# EAGLE board Music_Sync_Voltera (EAGLE 9.4.2)

Size 68.58 x 47.5 mm. Coordinates in mm from the lower left corner, seen from the top.
Copper layers (1*16): Top 0.035mm / dielectric 1.5mm / Bottom 0.035mm
Design rules "default": minimum track width 6mil, minimum drill 0.35mm, track to track 6mil, track to pad 6mil, pad to pad 6mil, via to via 6mil, smd to smd 6mil, copper to edge 40mil, drill to drill 6mil, minimum pad ring 10mil, minimum via ring 8mil, stop-mask expansion 4mil, vias tented up to drill 0mil, thermal gap 10mil

## Footprints (pad centres in the part's own frame; a part is rotated, then mirrored left to right if it is on the bottom)
ARDUINO_R3_VOLTERA = smd 0.711 x 1.422 bottom: A0 17.78,-21.844; A1 20.32,-21.844; A2 22.86,-21.844; A3 25.4,-21.844; A3V 2.54,-21.844; A4 27.94,-21.844; A5 30.48,-21.844; A5V 5.08,-21.844; AREF -9.144,21.844; D0 30.48,21.844; D1 27.94,21.844; D2 25.4,21.844; D3 22.86,21.844; D4 20.32,21.844; D5 17.78,21.844; D6 15.24,21.844; D7 12.7,21.844; D8 8.636,21.844; D9 6.096,21.844; D10 3.556,21.844; D11 1.016,21.844; D12 -1.524,21.844; D13 -4.064,21.844; GND1 7.62,-21.844; GND2 10.16,-21.844; GND3 -6.604,21.844; IOREF -2.54,-21.844; NC -5.08,-21.844; RESET 0,-21.844; SCL -14.224,21.844; SDA -11.684,21.844; VIN 12.7,-21.844 | drill 1.016 pad 1.778: ROW1 -15.24,8.636; ROW2 -15.24,6.096; ROW3 -15.24,3.556; ROW4 -15.24,1.016; ROW5 -15.24,-1.524; ROW6 -15.24,-4.064; ROW7 -15.24,-6.604; ROW8 -15.24,-9.144; ROW9 21.59,8.636; ROW10 21.59,6.096; ROW11 21.59,3.556; ROW12 21.59,1.016; ROW13 21.59,-1.524; ROW14 21.59,-4.064; ROW15 21.59,-6.604; ROW16 21.59,-9.144

## Placement (x,y rotation side)
E$1  [ARDUINO_R3_VOLTERA]  33.02,23.75 0 top

## Library data of the parts
E$1 = VirtualWire

## Nets
S$1: E$1.ROW3 E$1.ROW15
S$2: E$1.GND1 E$1.ROW4 E$1.ROW14
S$3: E$1.A5V E$1.ROW9
S$4: E$1.A0 E$1.ROW5
S$5: E$1.D9 E$1.ROW6
S$6: E$1.GND2 E$1.ROW8

## Tracks (layer width: path | path; a pad name or v marks a point on that pad's centre or on a via)
S$1  (1 unrouted)
S$2  (2 unrouted)
S$3  (1 unrouted)
S$4  (1 unrouted)
S$5  (1 unrouted)
S$6  (1 unrouted)